# EAGLE board BT Carrier 0.2 (EAGLE 8.5.2)
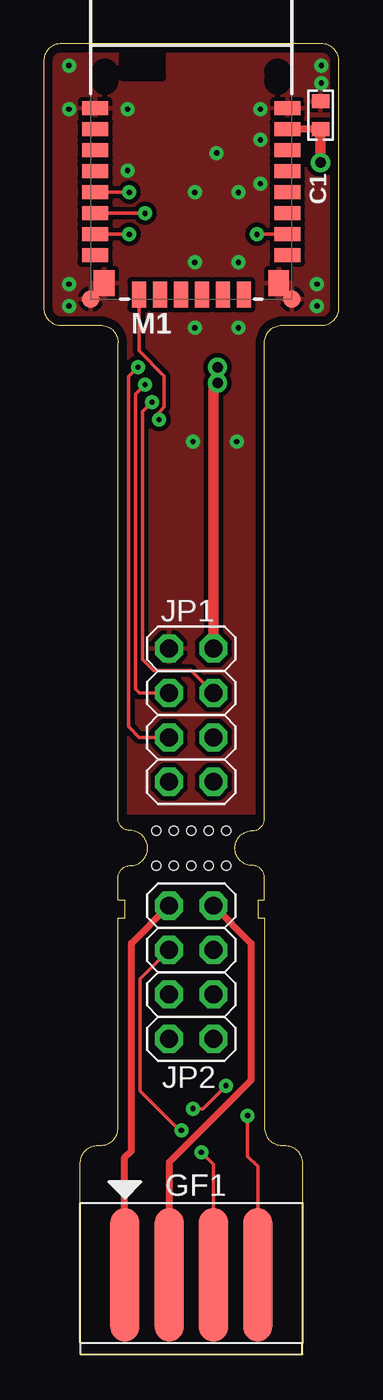
[diagram p0: board, top side]
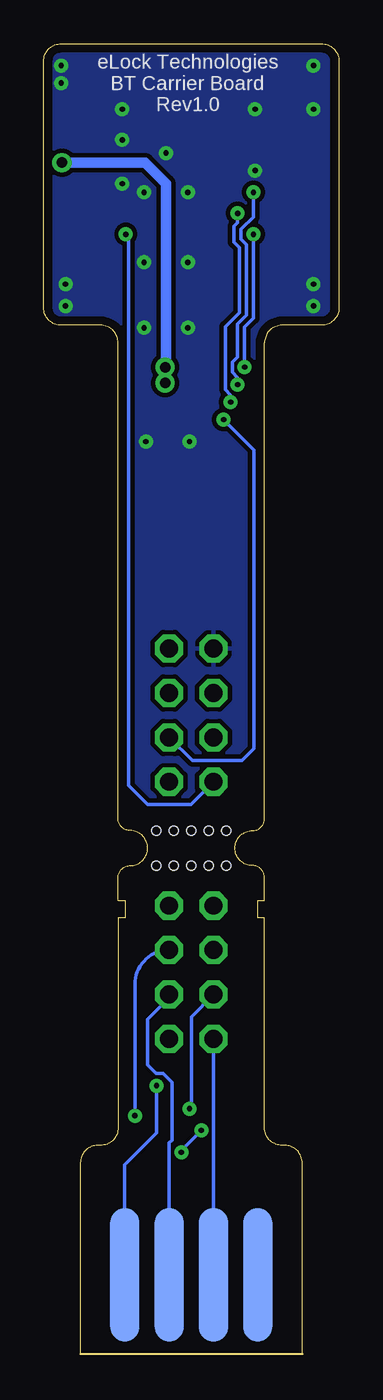
[diagram p1: board, bottom side, seen from below]

Size 16.9 x 74.95 mm. Coordinates in mm from the lower left corner, seen from the top.
Outline: 16.9,59.85 16.9,73.95 arc90 15.9,74.95 1,74.95 arc90 0,73.95 0,59.85 arc90 1,58.85 3.26,58.85 arc-90 4.26,57.85 4.26,30.64 arc90 4.95,29.95 arc-90 5.95,28.95 arc-90 4.95,27.95 arc90 4.26,27.26 4.26,25.95 4.65,25.95 4.65,24.95 4.26,24.95 4.26,12.95 arc-90 3.26,11.95 3.1,11.95 arc90 2.1,10.95 2.1,0 14.8,0 14.8,10.95 arc90 13.8,11.95 13.64,11.95 arc-90 12.64,12.95 12.64,24.95 12.25,24.95 12.25,25.95 12.64,25.95 12.64,27.26 arc90 11.95,27.95 arc-90 10.95,28.95 arc-90 11.95,29.95 arc90 12.64,30.64 12.64,57.85 arc-90 13.64,58.85 15.9,58.85 arc90 16.9,59.85
Copper layers (1*16): Top 0.035mm / dielectric 1.5mm / Bottom 0.035mm
Design rules "Class_5_0,20mm": minimum track width 0.2mm, minimum drill 0.3mm, track to track 0.2mm, track to pad 0.2mm, pad to pad 0.2mm, via to via 0.2mm, smd to smd 0.2mm, copper to edge 0.5mm, drill to drill 0.2mm, minimum pad ring 0.3mm, minimum via ring 0.25mm, stop-mask expansion 0.1mm, vias tented up to drill 0.6mm, thermal gap 0.25mm
Holes 0.5 mm at 10.45,27.95 9.45,27.95 8.45,27.95 7.45,27.95 6.45,27.95 10.45,29.95 9.45,29.95 8.45,29.95 7.45,29.95 6.45,29.95

## Footprints (pad centres in the part's own frame; a part is rotated, then mirrored left to right if it is on the bottom)
0603 = smd 0.8 x 1: 1 -0.8,0; 2 0.8,0
2X4_GOLD_FINGER = smd 1.651 x 7.62: 1 -3.81,3.9; 3 -1.27,3.9; 5 1.27,3.9; 7 3.81,3.9 | smd 1.651 x 7.62 bottom: 2 -3.81,3.9; 4 -1.27,3.9; 6 1.27,3.9; 8 3.81,3.9
2X04 = drill 1.016 octagon: 1 -3.81,-1.27; 2 -3.81,1.27; 3 -1.27,-1.27; 4 -1.27,1.27; 5 1.27,-1.27; 6 1.27,1.27; 7 3.81,-1.27; 8 3.81,1.27
BT_MODULE = smd 1.5 x 0.8: 1 0.25,10.9; 2 0.25,9.7; 3 0.25,8.5; 4 0.25,7.3; 5 0.25,6.1; 6 0.25,4.9; 7 0.25,3.7; 8 0.25,2.5; 17 11.25,2.5; 18 11.25,3.7; 19 11.25,4.9; 20 11.25,6.1; 21 11.25,7.3; 22 11.25,8.5; 23 11.25,9.7; 24 11.25,10.9 | smd 1 x 1: 9 0,0; 16 11.5,0 | smd 1.2 x 1.5: 9-1 0.75,0.9; 16-1 10.75,0.9 | smd 0.8 x 1.5: 10 2.75,0.25; 11 3.95,0.25; 12 5.15,0.25; 13 6.35,0.25; 14 7.55,0.25; 15 8.75,0.25

## Placement (x,y rotation side)
C1  10u/4V  [0603]  15.85,70.85 90 top
GF1  2X4_GOLD_FINGER  [2X4_GOLD_FINGER]  8.45,0.65 0 top
JP1  [2X04]  8.45,36.55 270 top
JP2  [2X04]  8.45,21.85 270 top
M1  RN4020  [BT_MODULE]  2.7,60.35 0 top

## Library data of the parts
C1 = discrete
GF1 = clackboard_lib
JP1 JP2 = pinhead
M1 = BT_modul

## Nets
+3.3V: C1.1 JP1.2 M1.23
+3.3V-1: GF1.3 JP2.2
BT_RTS: JP1.7 M1.18
BT_RTS-1: GF1.4 JP2.7
BT_U5RX: JP1.3 M1.5
BT_U5RX-1: GF1.5 JP2.3
BT_U5TX: JP1.4 M1.6
BT_U5TX-1: GF1.7 JP2.4
CON_LED: JP1.6 M1.10
CON_LED-1: GF1.6 JP2.6
DGND: C1.2 JP1.1 M1.1 M1.9 M1.9-1 M1.16 M1.16-1 M1.24
DGND-1: GF1.1 JP2.1
WAKE_SW: JP1.5 M1.7
WAKE_SW-1: GF1.8 JP2.5

## Tracks (layer width: path | path; a pad name or v marks a point on that pad's centre or on a via)
+3.3V  (via drill 0.6)
  Top 0.4: C1.1 M1.23
  Top 0.6: v15.85,68.15 C1.1 | v9.95,56.45 v9.95,55.55 9.72,55.32 JP1.2
  Bottom 0.6: v15.85,68.15 11.1,68.15 9.9,66.95 9.9,56.5 v9.95,56.45 | v9.95,55.55 9.95,56.35
+3.3V-1
  Top 0.4: JP2.2 11.88,23.5 11.88,15.68 7.18,10.98 GF1.3
BT_RTS  (via drill 0.3)
  Top 0.2: v12.2,64.05 M1.18
  Bottom 0.2: v12.2,64.05 12.04,63.89 12.04,32.54 10.95,31.45 8.47,31.45 JP1.7
BT_RTS-1
  Bottom 0.2: GF1.4 JP2.7
BT_U5RX  (via drill 0.3)
  Top 0.2: JP1.3 5.48,37.82 5.26,38.04 5.26,54.91 v5.8,55.45 | v4.9,66.45 M1.5
  Bottom 0.2: v5.8,55.45 5.8,55.86 6.1,56.16 6.1,56.74 5.8,57.04 5.8,58.92 5.3,59.42 5.3,63.46 5.6,63.76 5.6,64.34 4.9,65.04 v4.9,66.45
BT_U5RX-1  (via drill 0.3)
  Top 0.2: GF1.5 9.72,10.85 v9.02,11.55 | JP2.3 5.52,21.46 5.52,15.08 7.79,12.81 v7.88,12.81
  Bottom 0.2: v7.88,12.81 9.02,11.67 v9.02,11.55
BT_U5TX  (via drill 0.3)
  Top 0.2: M1.6 v5.8,65.25 | v6.2,54.45 5.66,53.91 5.66,39.74 6.3,39.1 8.44,39.1 JP1.4
  Bottom 0.2: v5.8,65.25 5.8,64.71 6,64.51 6,63.59 5.7,63.29 5.7,59.58 6.5,58.78 6.5,55.16 6.2,54.86 v6.2,54.45
BT_U5TX-1  (via drill 0.3)
  Top 0.2: GF1.7 12.26,10.74 11.68,11.32 v11.68,13.65
  Bottom 0.2: JP2.4 arc-90 11.68,21.16 v11.68,13.65
CON_LED  (via drill 0.3)
  Top 0.2: v6.6,53.45 6.6,53.86 6.9,54.16 6.9,55.94 5.45,57.39 M1.10
  Bottom 0.2: v6.6,53.45 4.86,51.71 4.86,34.64 5.55,33.95 8.39,33.95 JP1.6
CON_LED-1
  Bottom 0.2: JP2.6 9.72,20.38 10.95,19.15 10.95,16.55 10.47,16.07 10.07,16.07 9.55,15.55 9.55,12.25 9.72,12.08 GF1.6
DGND  (via drill 0.3)
  other vias: 1.45,73.7 1.45,71.2 12.4,71.2 4.8,71.2 4.8,67.7 1.45,61.2 15.65,61.2 15.65,59.95 1.45,59.95 15.9,72.7 15.9,73.7 11.15,62.45 11.15,66.45 8.65,66.45 8.65,62.45 8.65,58.7 11.15,58.7 11.05,52.2 8.55,52.2 12.4,69.45 12.4,66.95 9.9,68.7
  pour Top (isolate 0.254): 0,58.95 4.2,58.95 4.2,30.95 12.8,30.95 12.8,58.95 16.9,58.95 16.9,74.95 0,74.95
  pour Bottom (isolate 0.254): 0,58.95 4.2,58.95 4.2,30.95 12.8,30.95 12.8,58.95 16.9,58.95 16.9,74.95 0,74.95
DGND-1
  Top 0.4: GF1.1 4.64,11.25 5.02,11.63 5.02,23.5 JP2.1
WAKE_SW  (via drill 0.3)
  Top 0.2: JP1.5 5.47,35.28 4.86,35.89 4.86,55.91 v5.4,56.45 | v4.9,64.05 M1.7
  Bottom 0.2: v5.4,56.45 5.4,58.75 4.9,59.25 v4.9,64.05
WAKE_SW-1  (via drill 0.3)
  Top 0.2: v10.43,15.37 9.12,14.05 v8.55,14.05
  Bottom 0.2: GF1.8 12.26,10.84 10.43,12.67 v10.43,15.37 | JP2.5 8.45,19.31 8.45,14.15 v8.55,14.05

## Text on the board
bPlace: eLock Technologies / BT Carrier Board / Rev1.0
Measures: ALL CORNERS HAVE / 1.00MM RADIUS